# Altium PCB PCB1.PcbDoc
Units mil, origin at the board's own origin, x right, y up, seen from the top; angles counter-clockwise.
Board outline 3955 x 1775 mil, 2 copper layers (Top Layer, Bottom Layer); 8 components, 4 nets, 17 pads, 0 vias.
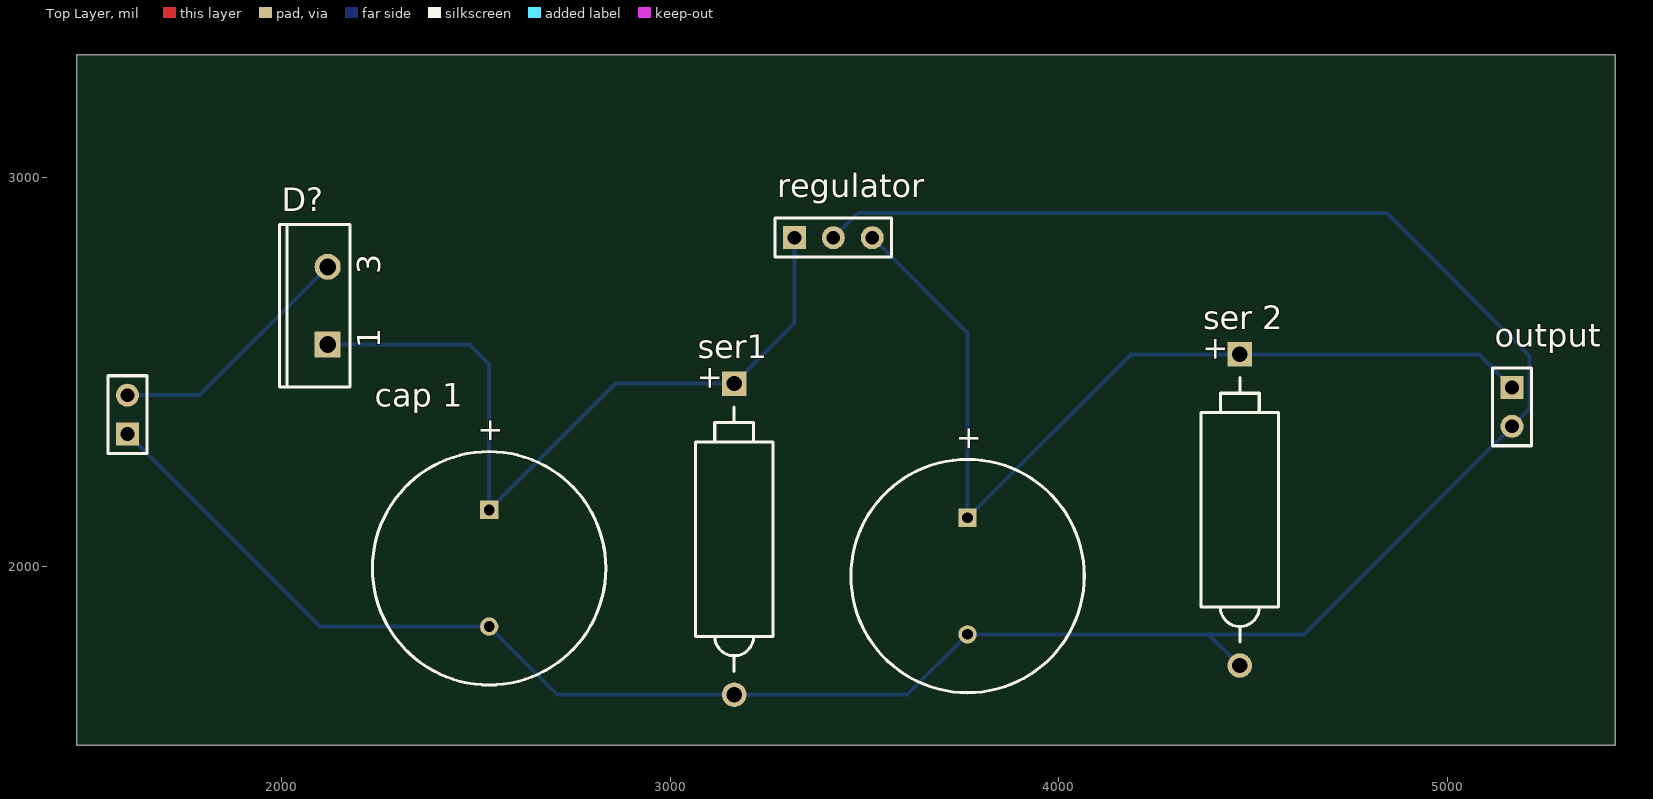
[diagram p0: Top Layer view]
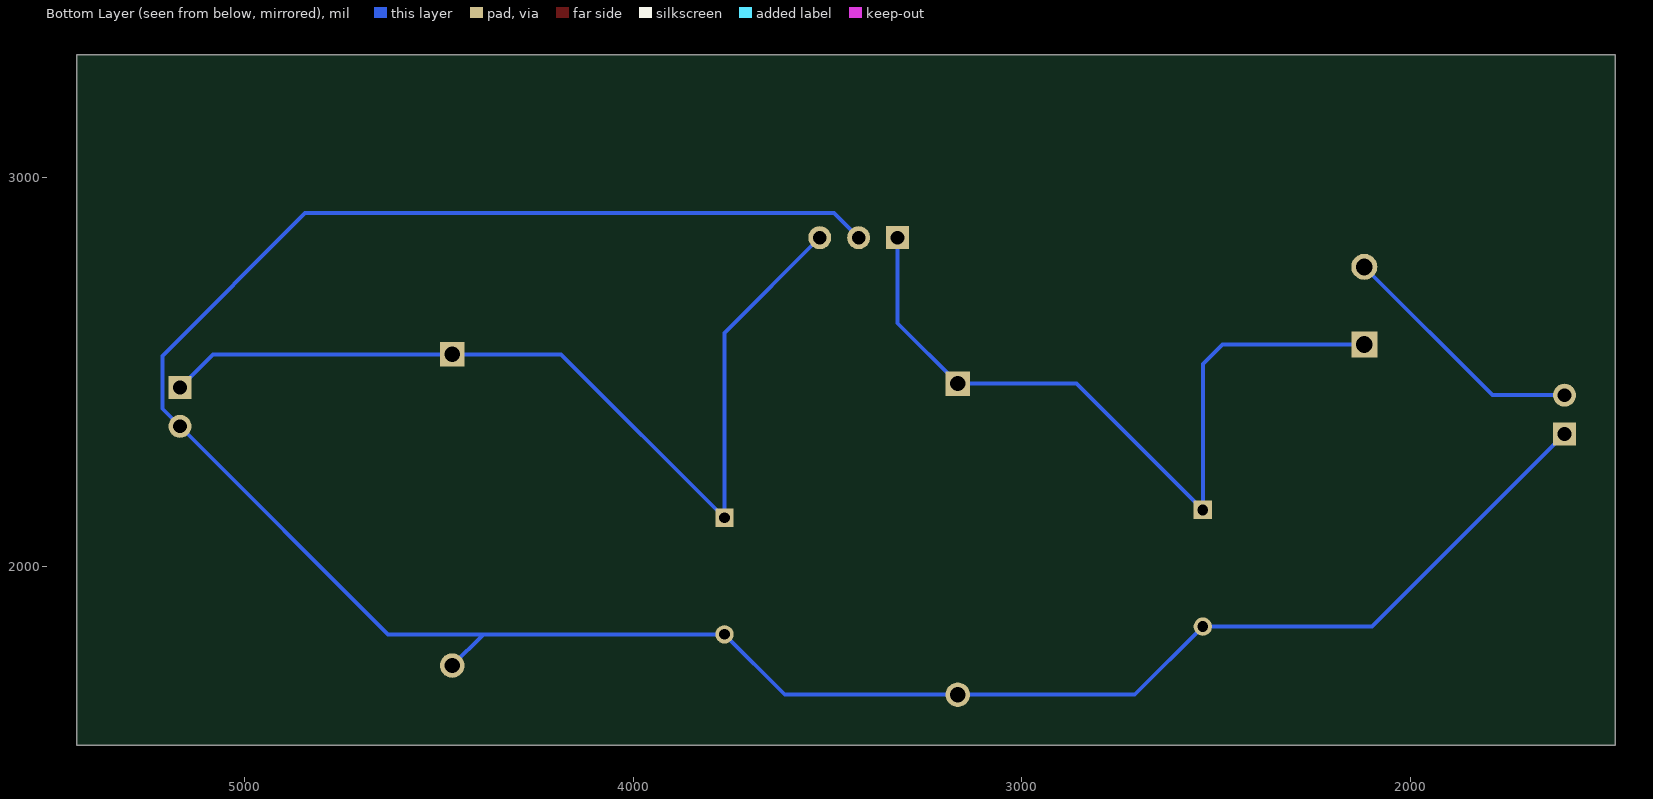
[diagram p1: Bottom Layer view, seen from below]

## Layer stack, top to bottom
Top Solder: solder mask 0.4, Solder Resist, Dk 3.5
Top Layer: signal copper 1.4
Dielectric 1: dielectric 12.6, FR-4, Dk 4.8
Bottom Layer: signal copper 1.4
Bottom Solder: solder mask 0.4, Solder Resist, Dk 3.5

## Board outline
1475,1540 5430,1540 5430,3315 1475,3315

## Design rules (kind name [scope] priority, off if disabled: settings)
Clearance [All] p1: gap=10 ignorepadtopadclearanceinfootprint=FALSE except(0: Arc-Hole Track-Hole SMDPad-Hole THPad-Hole Via-Hole Fill-Hole Poly-Hole Region-Hole Text-Hole)
PolygonConnect [All] p1: connectstyle=Relief reliefconductorwidth=10 reliefentries=4 polygonreliefangle="90 Angle" airgapwidth=10
RoutingLayers [All] p1: top layer_v5=FALSE bottom layer_v5=TRUE
RoutingVias [All] p1: holewidth=28 width=50 viastyle="Through Hole" minholewidth=28 minwidth=50 maxholewidth=28 maxwidth=50
SolderMaskExpansion [All] p1: expansion=4 istentingtop=FALSE
Width [All] p1: maxlimit=10 minlimit=10 preferedwidth=10
29 further rules are at their usual default settings.

## Classes and differential pairs
component class Sheet1: "cap 1" D? output regulator ser1 "ser 2"

## Components (designator, comment, footprint, x,y, rotation, side; value= is the part's Value field where it differs from the comment)
"cap 1" "Cap Pol1" RB7.6-15 2535,1995 r90 top value=0.22
"cap 2" "Cap Pol1" RB7.6-15 3765,1975 r90 top value=10
D? "Diode 10TQ035" TO-220AC 2120,2670 r90 top
input "Header 2" HDR1X2#1 1605,2340 r90 top
output "Header 2" HDR1X2#2 5165,2460 r270 top
regulator "Header 3" HDR1X3 3320,2845 r0 top
ser1 "Cap Pol2" POLAR0.8 3165,2070 r90 top value=0.1
"ser 2" "Cap Pol2" POLAR0.8 4465,2145 r90 top value=0.1

## Footprints (in the part's own frame and the unit in brackets; to place one, negate y for a bottom-side part, rotate by r counter-clockwise, add the part's x,y. Pads: shape width x height; smd on the part's side, far side on the other; paste and mask are expansions set on the pad)
HDR1X2#1 [mm] "Connector; Header; 2 Position"
  rect 1.5x1.5 hole 0.9: 1(0,0)
  round 1.5 hole 0.9: "  "(2.54,0)
  silkscreen extent -1.27,-1.27 3.81,1.27
HDR1X2#2 [mm] "Connector; Header; 2 Position"
  rect 1.5x1.5 hole 0.9: 1(0,0)
  round 1.5 hole 0.9: 2(2.54,0)
  silkscreen extent -1.27,-1.27 3.81,1.27
HDR1X3 [mm] "Connector; Header; 3 Position"
  rect 1.5x1.5 hole 0.9: 1(0,0)
  round 1.5 hole 0.9: 2(2.54,0) 3(5.08,0)
  silkscreen extent -1.27,-1.27 6.35,1.27
POLAR0.8 [mm] "Polarized Capacitor; 2 Leads"
  rect 1.6x1.6 hole 1: 1(10.16,0)
  round 1.6 hole 1: 2(-10.16,0)
  silkscreen extent -8.64,-2.54 8.64,2.54
RB7.6-15 [mm] "Polarized Capacitor (Radial); 2 Leads"
  rect 1.2x1.2 hole 0.7: 1(3.81,0)
  round 1.2 hole 0.7: 2(-3.81,0)
  silkscreen extent -7.62,-7.62 7.62,7.62
TO-220AC [mm] "TO, Thru-Hole, Vertical, Heatsink Mounted; 3 In-Line Leads (1 Absent); Pitch 2.54 mm"
  rect 1.7x1.7 hole 1.1: 1(-2.54,0)
  round 1.7 hole 1.1: 3(2.54,0)
  silkscreen extent -5.3,-1.45 5.3,3.15

## Part data
"cap 1" "cap 2": "Polarized Capacitor (Radial)", LatestRevisionDate=17-Jul-2002, LatestRevisionNote="Re-released for DXP Platform.", PackageDescription="Polarized Capacitor (Radial); 2 Leads", PackageReference=RB7.6-15, Published=8-Jun-2000, Publisher="Altium Limited"
D?: "Schottky Rectifier", ComponentLink1Description="Manufacturer Link", ComponentLink1URL=http://www.irf.com/, ComponentLink2Description=Datasheet, ComponentLink2URL=http://www.irf.com/product-info/datasheets/data/10tq.pdf, DatasheetVersion=PD-2.057B, LatestRevisionDate=17-Jul-2002, LatestRevisionNote="Re-released for DXP Platform.", Note="Terminal 2 is the TAB and is electrically connected to the cathode", PackageDescription="TO, Thru-Hole, Vertical, Heatsink Mounted; 3 In-Line Leads (1 Absent); Pitch 2.54 mm", PackageReference=TO-220AC, PackageVersion=Feb-1998, Published=8-Jun-2000, Publisher="Altium Limited"
input output: "Header, 2-Pin", LatestRevisionDate=17-Jul-2002, LatestRevisionNote="Re-released for DXP Platform.", Publisher="Altium Limited"
regulator: "Header, 3-Pin", LatestRevisionDate=17-Jul-2002, LatestRevisionNote="Re-released for DXP Platform.", Publisher="Altium Limited"
ser1 "ser 2": "Polarized Capacitor (Axial)", LatestRevisionDate=17-Jul-2002, LatestRevisionNote="Re-released for DXP Platform.", PackageDescription="Polarized Capacitor; 2 Leads", PackageReference=POLAR0.8, Published=8-Jun-2000, Publisher="Altium Limited"

## Nets (pads, with @x,y where several pads share a name; then routed paths per layer and width w, separated by ;. In a path a pad name is that pad's centre, name@x,y a point inside that pad or via, vN(x,y) a via of type N, cw(c..) or ccw(c..) an arc to the next point about the centre after c; other vN are vias at no path point)
5v: "cap 2.1" "ser 2.1" output.1 regulator.3 | length 2430.7
  Bottom Layer w10: regulator.3 3765,2600 3765,2125 4185,2545 4465,2545 5080,2545 output.1
12v: "cap 1.1" D?.1 regulator.1 ser1.1 | length 2014.5
  Bottom Layer w10: D?.1 2485,2570 2535,2520 2535,2145 2860,2470 ser1.1 3320,2625 regulator.1
GND: "cap 1.2" "cap 2.2" "ser 2.2" input.1 output.2 regulator.2 ser1.2 | length 6404.2
  Bottom Layer w10: input.1 2100,1845 2535,1845 2710,1670 ser1.2 3610,1670 3765,1825 4385,1825 ; regulator.2 3483,2908 4843,2908 5210,2541 5210,2405 output.2 4630,1825 4385,1825 ; 4465,1745 4385,1825
NetD?_3: "input.  " D?.3 | length 651.7
  Bottom Layer w10: 1605,2440 1790,2440 D?.3

## Dimensions
1475,1540 to 1475,3315 on Top Layer
5420,3365 to 1480,3330 on Top Layer

## Text inside footprints (layer, text, board x,y; h text height)
"cap 1": Top Overlay "+" at 2564.01,2315.15 h59.06 r90
"cap 2": Top Overlay "+" at 3794.01,2295.15 h59.06 r90
D?: Top Overlay "1" at 2254.84,2560.16 h59.06 r90; Top Overlay "3" at 2254.84,2750.32 h59.06 r90
ser1: Top Overlay "+" at 3127.6,2450 h59.06 r90
"ser 2": Top Overlay "+" at 4427.6,2525 h59.06 r90